# Altium PCB lined.PcbDoc (part 2 of 2)
Units mm, origin at the board's own origin, x right, y up, seen from the top; angles counter-clockwise.
Board outline 88.9 x 108.89 mm, 2 copper layers (Top Layer, Bottom Layer); 109 components, 117 nets, 494 pads, 325 vias.
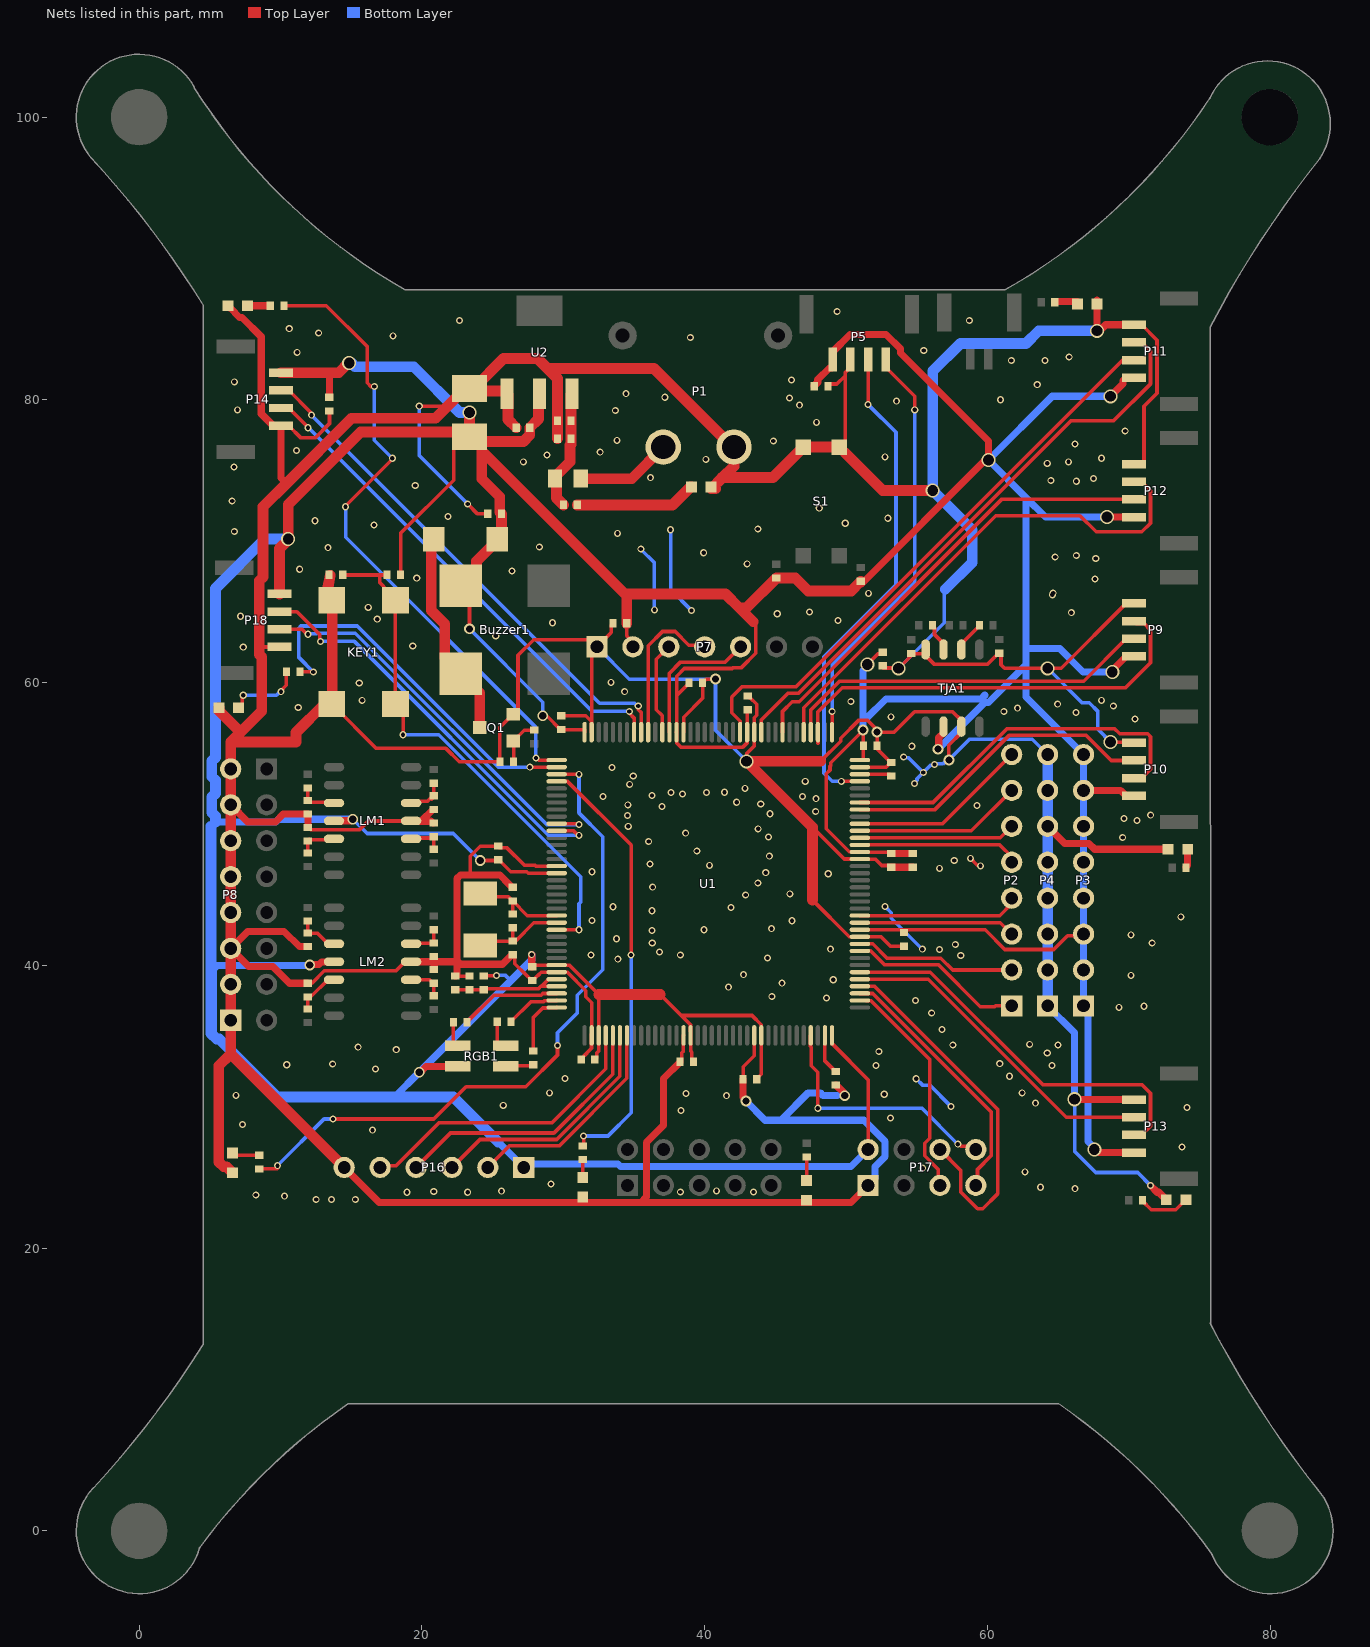
[diagram p2: the nets of this part, all layers, seen from the top]

## Via types
v1: diameter 0.5, hole 0.3, Top Layer to Bottom Layer, tented both sides, 293 vias
v2: diameter 0.991, hole 0.762, Top Layer to Bottom Layer, tented both sides, 16 vias
v3: diameter 0.762, hole 0.508, Top Layer to Bottom Layer, tented both sides, 16 vias

## Nets (pads, with @x,y where several pads share a name; then routed paths per layer and width w, separated by ;. In a path a pad name is that pad's centre, name@x,y a point inside that pad or via, vN(x,y) a via of type N, cw(c..) or ccw(c..) an arc to the next point about the centre after c; other vN are vias at no path point) (continued)
GND: C1.2 C2.2 C3.2 C4.2 C5.2 C6.2 C7.1 C8.1 C9.2 C10.1 C11.1 C12.1 C13.1 C14.1 C15.1 C16.1 C17.1 C18.1 C19.1 C20.1 C21.1 C22.1 C23.1 C24.1 C25.1 C26.1 C27.1 C28.1 C29.1 E1.2 KEY1.1 KEY1.2 LED1.2 LED2.2 LED3.2 LED4.2 LED5.2 LED6.2 LED7.2 LED8.2 LED9.2 LM1.11 LM2.11 P1.2 P4.1 P4.2 P4.3 P4.4 P4.5 P4.6 P4.7 P4.8 P5.3 P7.1 P8.1 P8.2 P8.3 P8.4 P8.5 P8.6 P8.7 P8.8 P9.4 P10.4 P11.4 P12.4 P13.4 P14.4 P16.6 P17.1 P18.4 Q1.1 R5.1 R6.1 R8.1 R9.1 R15.1 R16.1 R18.1 R19.1 R26.1 S1.1 S1.3 TJA1.3 TJA1.8 U1.16 U1.31 U1.38 U1.51 U1.61 U1.83 U1.94 U1.107 U1.120 U1.130 U1.143 U2.1 | length 640
  Top Layer w0.254: 8.497,62.662 8.636,62.523 P18.4@9.931,62.523 ; P14.4@10.033,78.176 10.583,78.176 11.451,77.308 12.446,77.308 13.462,78.324 C28.1@13.462,79.223 ; R19.1@11.919,38.739 12.224,38.739 13.099,39.614 18.17,39.614 18.81,40.254 LM2.11@19.235,40.254 ; R9.1@11.937,49.759 11.983,49.759 12.156,49.586 15.593,49.586 16.223,50.216 LM1.11@19.235,50.216 ; KEY1.1@13.625,58.479 13.65,58.479 16.782,55.347 21.699,55.347 22.639,54.407 R26.1@25.519,54.407 25.519,56.841 26.1,57.422 26.1,57.447 26.423,57.77 Q1.1@26.448,57.77 26.473,57.77 26.796,58.093 26.796,61.929 27.91,63.043 31.877,63.043 P7.1@32.385,62.535 ; v1(19.812,79.553) 21.59,79.553 21.699,79.444 ; C13.1@22.398,39.243 C14.1@23.368,39.243 ; v1(23.241,72.631) 23.938,71.934 C12.1@24.663,71.934 ; 23.495,46.401 23.419,46.477 23.419,47.716 24.138,48.435 C22.1@25.4,48.435 25.527,48.308 26.026,48.308 27.255,47.079 27.999,47.079 28.057,47.021 U1.16@29.534,47.021 ; C2.2@26.416,40.754 26.449,40.754 26.576,40.627 26.576,40.119 27.376,39.319 27.386,39.319 27.767,38.938 C18.1@27.813,38.938 27.859,38.938 28.24,39.319 28.25,39.319 28.443,39.512 29.525,39.512 U1.31@29.534,39.521 29.543,39.512 30.297,39.512 31.601,38.208 31.601,37.774 32.009,37.366 32.009,35.123 32,35.114 32,34.131 31.648,33.779 31.648,33.77 31.267,33.389 C23.1@31.267,33.343 ; C19.1@29.845,57.658 31.601,57.658 32,57.259 32,56.505 U1.143@32.009,56.496 32.009,62.159 P7.1@32.385,62.535 ; C8.1@33.528,64.186 33.401,64.059 33.401,63.551 P7.1@32.385,62.535 ; C24.1@38.252,33.198 38.379,33.325 38.379,33.821 38.5,33.942 38.5,35.037 U1.51@38.509,35.046 ; U1.130@38.509,56.496 38.518,56.505 38.518,57.552 39.853,58.887 C25.1@39.853,60.001 40.101,60.249 v3(40.767,60.249) ; C26.1@42.723,31.943 42.723,32.83 43.509,33.617 U1.61@43.509,35.046 ; v2(42.968,54.432) 42.968,54.988 43.5,55.52 43.5,56.487 U1.120@43.509,56.496 43.518,56.505 43.518,57.524 43.683,57.689 43.683,58.471 43.236,58.918 43.18,58.918 C27.1@43.053,59.045 ; 47.625,44.626 50.221,42.03 50.975,42.03 U1.83@50.984,42.021 52.479,42.021 53.149,41.351 C20.1@54.102,41.351 ; 47.625,49.775 49.878,47.522 50.982,47.522 U1.94@50.984,47.521 50.993,47.512 52.088,47.512 52.534,47.066 53.086,47.066 C9.2@53.213,46.939 ; 48.2,54.432 49.628,55.861 49.628,56.065 50.916,57.353 51.505,57.353 52.1,56.759 52.1,56.602 v3(52.197,56.505) ; C7.1@48.717,80.95 48.717,80.995 48.844,81.122 49.352,81.122 49.948,81.718 ; S1.3@49.525,76.66 49.948,76.237 49.948,81.718 ; P5.3@50.312,82.855 50.312,82.305 49.948,81.941 49.948,81.718 ; U1.107@50.984,54.021 52.832,54.021 53.167,54.356 52.197,55.326 C21.1@52.197,55.55 v3(52.197,56.505) ; C29.1@52.601,61.062 52.626,61.036 53.696,61.036 v2(53.721,61.011) 54.756,62.046 55.466,62.046 TJA1.8@55.626,62.206 ; TJA1.8@55.626,62.344 TJA1.8@55.626,62.206 ; v3(57.277,54.534) 57.277,55.58 58.166,56.469 TJA1.3@58.166,56.894 58.166,57.319 57.536,57.949 54.85,57.949 53.406,56.505 v3(52.197,56.505) ; v1(58.801,47.574) 59.287,47.088 59.465,47.088 v1(59.512,47.041) ; v2(67.754,84.887) v2@67.945,84.887 ; v2(68.707,55.804) 68.737,55.774 70.328,55.774 P10.4@70.358,55.744 ; P9.4@70.358,65.601 69.808,65.601 65.218,61.011 v2(64.262,61.011) 61.214,61.011 60.96,61.265 60.96,61.956 C11.1@60.833,62.083 60.787,62.083 59.993,61.289 56.256,61.289 55.626,61.919 TJA1.8@55.626,62.206 ; P12.4@70.358,75.458 70.908,75.458 71.081,75.631 71.081,79.555 71.995,80.469 71.995,84.227 70.908,85.315 P11.4@70.358,85.315
  Top Layer w0.508: LED2.2@6.286,86.666 6.773,86.18 6.773,86.154 7.1,85.827 7.279,85.827 8.64,84.465 8.64,79.019 9.483,78.176 P14.4@10.033,78.176 10.033,74.475 10.414,74.094 ; P8.7@6.477,51.359 7.684,50.152 9.649,50.152 10.195,50.698 R6.1@11.937,50.698 R9.1@11.937,49.759 ; R19.1@11.919,38.739 10.644,38.739 9.454,39.929 7.747,39.929 P8.3@6.477,41.199 7.684,42.406 10.254,42.406 11.335,41.326 R16.1@11.937,41.326 ; P16.6@14.503,25.705 16.981,23.228 35.496,23.228 ; LM2.11@19.235,40.254 20.955,40.254 ; LM1.11@19.235,50.216 19.253,50.198 20.644,50.198 20.782,50.06 R8.1@20.828,50.06 ; 19.985,50.233 20.782,51.03 R5.1@20.828,51.03 ; R18.1@20.828,39.704 20.874,39.704 20.874,40.173 20.955,40.254 ; C13.1@22.352,39.243 22.398,39.243 22.398,39.289 22.473,39.364 22.473,40.354 ; C2.2@26.416,40.754 26.37,40.754 25.702,40.086 22.741,40.086 22.473,40.354 ; C1.2@26.416,45.53 26.37,45.53 25.879,46.021 25.879,46.042 25.519,46.401 23.495,46.401 22.741,46.401 22.473,46.133 22.473,40.354 ; C24.1@38.252,33.198 38.252,33.152 37.093,31.993 37.093,28.691 35.877,27.475 35.877,23.609 35.496,23.228 ; C26.1@42.723,31.943 42.723,30.676 42.926,30.473 v3(42.926,30.404) ; C16.1@49.27,31.528 49.316,31.528 49.857,30.988 49.857,30.833 v3(49.905,30.785) ; P17.1@51.562,24.435 50.348,23.22 49.347,23.22 49.34,23.228 35.496,23.228 ; C9.2@53.213,46.939 C17.1@54.737,46.939 ; P4.6@64.262,49.835 65.469,48.628 67.176,48.628 67.592,48.212 LED7.2@72.784,48.212 ; v2@66.167,30.511 P13.4@70.358,30.511 ; v2(67.754,84.887) LED6.2@67.754,86.79 LED6.2@67.754,87.044 ; v2@67.945,84.887 68.373,85.315 P11.4@70.358,85.315 ; v1(71.538,24.435) 72.019,23.954 72.123,23.954 LED8.2@72.656,23.42 ; 20.955,40.254 22.373,40.254 22.473,40.354
  Top Layer w0.762: LED3.2@5.651,58.218 5.651,58.013 7.035,56.629 7.302,56.629 ; P8.7@6.477,51.185 P8.8@6.477,53.725 ; LED4.2@6.602,25.336 6.183,25.756 5.981,25.756 5.639,26.098 5.639,32.893 6.477,33.731 ; KEY1.1@13.1,58.471 11.096,56.467 11.096,55.804 6.477,55.804 ; KEY1.2@13.36,66.056 13.36,66.765 C6.2@13.521,67.598 ; KEY1.1@13.625,58.479 13.661,58.515 13.661,65.793 KEY1.2@13.625,65.829 ; P16.6@14.503,25.705 6.477,33.731 ; C3.2@26.67,78.029 26.09,78.609 26.09,80.364 U2.1@26.021,80.433 26.021,80.554 25.952,80.623 23.558,80.623 E1.2@23.368,80.814 ; C5.2@29.591,77.267 C4.2@29.591,78.537 29.587,78.541 29.587,81.518 28.885,82.22 ; LED1.2@40.767,73.711 40.475,73.711 41.27,74.506 ; 41.224,74.506 41.27,74.506 ; 47.625,44.626 47.625,49.775 v2(42.968,54.432) 48.2,54.432 ; S1.3@49.525,76.66 S1.1@46.985,76.66 44.831,74.506 41.27,74.506 ; S1.3@49.948,76.237 52.601,73.584 v2(56.134,73.584) ; 6.477,33.731 P8.1@6.477,36.119 P8.2@6.477,38.659 P8.3@6.477,41.199 P8.4@6.477,43.739 P8.5@6.477,46.279 P8.6@6.477,48.819 P8.7@6.477,51.359 P8.8@6.477,53.899 6.477,55.804 ; 6.477,55.804 7.302,56.629 ; 7.302,56.629 8.665,57.992 8.665,61.812 8.497,61.981 8.497,62.662 8.497,67.212 8.761,67.477 8.761,72.442 10.414,74.094 15.02,78.7 20.954,78.7 21.699,79.444 23.068,80.814 E1.2@23.368,80.814 ; E1.2@23.368,80.814 23.668,80.814 25.774,82.92 28.185,82.92 28.885,82.22 ; 28.885,82.22 36.424,82.22 42.073,76.57 42.073,75.309 41.27,74.506
  Bottom Layer w0.254: v1(19.812,79.553) 19.812,76.06 v1(23.241,72.631) ; P7.1@32.385,62.535 34.671,60.249 v3(40.767,60.249) 40.767,56.633 v2(42.968,54.432) ; v1(35.484,69.444) 36.449,68.478 v1(36.449,65.151) ; v1(37.592,70.815) 37.592,66.573 v1(39.065,65.1) ; v1(52.756,44.171) 53.202,43.724 53.202,43.343 v1(55.397,41.148) ; v2(53.721,61.011) 56.951,64.241 56.951,66.527 57.023,66.599 ; v1(54.077,54.737) 54.124,54.69 54.421,54.69 v1(55.466,53.645) ; v1(54.839,52.857) 54.839,52.924 55.02,53.105 55.02,53.199 v1(55.466,53.645) ; v1(54.966,31.979) 55.412,31.532 55.92,31.532 v1(57.429,30.023) ; P4.8@64.262,54.915 63.182,55.995 58.738,55.995 v3(57.277,54.534) 57.14,54.534 56.856,54.251 56.303,54.251 v1(56.256,54.204) 56.209,54.157 55.978,54.157 v1(55.466,53.645) ; v2(64.262,61.011) 66.69,58.582 67.198,58.582 67.818,57.963 67.818,56.693 v2(68.707,55.804) ; v2(66.167,30.531) 66.167,26.848 67.667,25.347 70.626,25.347 v1(71.538,24.435)
  Bottom Layer w0.508: v3(42.926,30.404) 44.279,29.051 45.466,29.051 ; 49.403,30.785 48.371,30.785 48.172,30.984 47.332,30.984 45.466,29.118 45.466,29.051 ; P17.1@51.562,24.435 52.058,24.931 52.058,25.764 52.769,26.475 52.769,27.546 51.264,29.051 45.466,29.051 ; P4.1@64.262,37.135 66.167,35.23 v2(66.167,30.531)
  Bottom Layer w0.762: 57.023,66.599 58.928,68.504 58.928,70.79 v2(56.134,73.584) 56.134,82.038 58.094,83.998 62.738,83.998 63.627,84.887 v2(67.754,84.887) ; P4.1@64.262,37.135 P4.2@64.262,39.675 P4.3@64.262,42.215 P4.4@64.262,44.755 P4.5@64.262,47.295 P4.6@64.262,49.835 P4.7@64.262,52.375 P4.8@64.262,54.915
  other v1: 12.522,23.444 13.614,23.444 15.291,23.444 10.287,23.673 8.255,23.749 18.948,23.952 23.241,23.952 38.278,23.978 43.459,23.978 20.838,24.003 25.629,24.028 40.843,24.054 66.192,24.206 63.754,24.308 29.134,24.536 62.662,25.4 55.423,25.654 73.762,27.153 16.51,28.346 7.315,28.753 53.149,29.21 38.329,29.743 74.117,29.947 25.756,30.099 63.398,30.251 41.554,30.785 6.858,30.81 52.705,30.886 38.684,30.937 29.032,30.988 62.459,30.988 30.124,32.004 61.57,32.156 16.713,32.664 52.121,32.918 64.567,32.918 10.439,32.969 13.691,33.02 60.877,33.045 64.237,33.807 52.324,33.9 18.186,34.036 15.494,34.214 57.556,34.366 64.999,34.366 62.992,34.417 56.794,35.458 56.058,36.627 69.317,37.033 71.069,37.109 54.915,37.516 48.616,37.694 44.755,37.795 41.681,38.456 45.466,38.739 49.098,38.984 70.155,39.294 42.748,39.345 33.858,40.437 44.45,40.513 58.115,40.691 31.953,40.742 38.278,40.742 36.805,40.945 56.617,41.126 48.895,41.148 57.734,41.478 36.297,41.58 71.653,41.58 33.757,41.885 70.155,42.164 36.271,42.469 39.954,42.52 44.729,42.596 46.177,43.155 32.029,43.18 73.685,43.434 36.271,43.866 41.859,44.094 33.509,44.145 42.901,44.983 46.025,45.06 36.322,45.53 43.764,45.822 48.743,46.482 44.323,46.558 32.029,46.622 56.617,46.863 40.335,47.079 36.144,47.168 57.658,47.422 44.577,47.727 39.446,48.082 36.043,48.768 69.571,49.047 44.509,49.082 38.659,49.352 43.79,49.657 34.595,49.835 70.587,50.241 69.672,50.394 34.544,50.597 71.552,50.622 44.628,50.724 47.854,50.876 36.982,51.232 59.258,51.308 34.569,51.359 43.967,51.41 42.266,51.537 47.879,51.791 32.817,51.943 46.914,51.943 36.271,52.019 38.43,52.121 37.617,52.222 40.132,52.222 41.402,52.248 42.85,52.521 34.696,52.807 47.117,53.021 34.95,53.391 33.452,54 54.656,55.499 70.434,57.429 53.188,57.582 66.269,57.887 61.163,57.949 62.128,58.191 11.252,58.242 68.91,58.344 64.973,58.479 50.343,58.674 15.773,58.75 68.072,58.75 34.341,59.36 15.57,59.969 33.376,60.02 7.366,62.509 19.355,62.586 25.222,63.297 29.235,64.237 49.428,64.389 16.84,64.491 7.163,64.694 45.136,64.872 65.938,64.948 47.422,64.999 16.205,65.329 64.592,66.218 51.587,66.319 64.653,66.345 67.615,67.335 19.634,67.386 26.37,67.894 11.354,68.021 43.009,68.402 67.666,68.783 64.795,68.885 66.294,68.986 39.929,69.19 13.36,69.545 28.308,69.596 33.833,70.561 6.731,70.688 43.764,70.866 16.612,71.145 49.948,71.272 12.446,71.45 52.959,71.628 21.844,71.755 48.108,72.339 6.579,72.847 19.533,73.939 66.294,74.244 64.491,74.295 67.513,74.447 36.17,74.498 6.706,75.26 64.237,75.514 27.178,75.616 65.735,75.616 40.081,75.794 68.072,75.87 52.756,75.971 28.854,76.098 32.614,76.302 11.125,76.429 66.192,76.886 44.856,77.098 33.807,77.14 69.748,77.8 47.904,78.41 33.68,79.248 6.96,79.299 46.711,79.629 53.569,79.908 60.935,80.01 45.999,80.137 37.186,80.188 34.442,80.442 63.525,81.077 6.731,81.28 46.152,81.407 61.697,82.779 64.084,82.779 65.786,83.033 11.176,83.363 55.499,83.49 38.989,84.404 17.958,84.531 12.7,84.734 10.617,85.039 22.657,85.623 58.725,85.623 49.378,86.258
I2C1_SCL: P14.2 U1.136 | length 36.5
  Top Layer w0.254: P14.2@10.033,80.676 10.583,80.676 12.145,79.114 12.145,78.965 v1(12.192,78.918) ; v1(35.306,58.344) 35.306,58.09 35.509,57.887 U1.136@35.509,56.496
  Bottom Layer w0.254: v1(12.192,78.918) 32.567,58.543 35.04,58.543 35.239,58.344 v1(35.306,58.344)
I2C1_SDA: P14.3 U1.137 | length 35.2
  Top Layer w0.254: P14.3@10.033,79.426 10.583,79.426 11.938,78.071 v1(11.938,78.029) ; v1(34.671,57.963) 34.671,57.836 35.009,57.498 U1.137@35.009,56.496
  Bottom Layer w0.254: v1(11.938,78.029) 11.985,78.029 32.051,57.963 v1(34.671,57.963)
I2C2_SCL: P18.2 U1.11 | length 29.7
  Top Layer w0.254: P18.2@9.931,65.023 9.933,65.02 11.162,65.02 12.78,63.402 12.78,62.963 v1(12.827,62.916) ; U1.11@29.534,49.521 30.727,49.521 31.048,49.2 v1(31.115,49.2)
  Bottom Layer w0.254: v1(12.827,62.916) 15.23,62.916 28.946,49.2 v1(31.115,49.2)
I2C2_SDA: P18.3 U1.10 | length 28.6
  Top Layer w0.254: P18.3@9.931,63.773 11.522,63.773 11.871,63.424 v1(11.938,63.424) ; U1.10@29.534,50.021 30.989,50.021 31.048,49.962 v1(31.115,49.962)
  Bottom Layer w0.254: v1(11.938,63.424) 11.985,63.471 12.562,63.471 12.587,63.496 15.296,63.496 28.83,49.962 v1(31.115,49.962)
IRQ: P17.8 U1.69 | length 17.8
  Top Layer w0.254: U1.69@47.509,35.046 47.489,35.027 47.489,34.272 47.552,34.209 47.552,32.902 48.009,32.445 v1(48.009,29.896) ; v1(57.912,27.356) 57.979,27.356 58.121,27.213 58.944,27.213 P17.8@59.182,26.975
  Bottom Layer w0.254: v1(48.009,29.896) 55.372,29.896 v1(57.912,27.356)
NetBuzzer1_2: Buzzer1.2 D1.2 Q1.3 | length 14.8
  Top Layer w0.762: D1.2@20.828,70.155 20.656,69.983 20.656,65.111 21.622,64.146 21.622,61.749 Buzzer1.2@22.741,60.63 24.098,59.272 Q1.3@24.098,56.82
NetC4_1: C4.1 C5.1 F1.1 R2.1 U2.3 | length 8.6
  Top Layer w0.762: R2.1@30.023,72.568 29.528,73.062 29.528,74.307 F1.1@29.409,74.426 29.409,74.561 30.48,75.631 30.48,76.791 30.556,76.867 C5.1@30.556,77.267 C4.1@30.556,78.537 30.556,80.368 U2.3@30.621,80.433
NetC15_2: C15.2 U1.106 | length 2.3
  Top Layer w0.254: U1.106@50.984,53.521 50.993,53.512 53.092,53.512 C15.2@53.213,53.391
NetC16_2: C16.2 U1.71 | length 2.9
  Top Layer w0.254: U1.71@48.509,35.046 48.509,33.238 49.224,32.523 C16.2@49.195,32.494
NetLED1_1: LED1.1 R2.2 | length 8.6
  Top Layer w0.762: R2.2@30.988,72.568 37.733,72.568 39.003,73.838 LED1.1@39.065,73.838
NetLED2_1: LED2.1 R30.1 | length 1.6
  Top Layer w0.508: LED2.1@7.671,86.665 R30.1@9.271,86.665
NetLED3_1: LED3.1 R31.1 | length 5.4
  Top Layer w0.254: LED3.1@7.036,58.217 7.29,58.471 7.29,58.963 7.366,59.039 v1(7.366,59.106) ; v1(10.033,59.36) 10.033,59.426 10.414,59.807 R31.1@10.414,60.757
  Bottom Layer w0.254: v1(7.366,59.106) 9.712,59.106 9.966,59.36 v1(10.033,59.36)
NetLED4_1: LED4.1 R32.1 | length 2
  Top Layer w0.254: LED4.1@6.604,26.721 6.756,26.568 R32.1@8.509,26.568
NetLED5_1: LED5.1 R33.1 | length 1.5
  Top Layer w0.254: LED5.1@31.357,24.765 31.369,24.777 R33.1@31.369,26.264
NetLED6_1: LED6.1 R34.1 | length 1.6
  Top Layer w0.508: R34.1@64.77,86.919 64.77,86.965 LED6.1@66.37,86.965
NetLED7_1: LED7.1 R35.1 | length 1.3
  Top Layer w0.508: R35.1@74.041,46.914 74.041,46.96 74.149,47.068 74.149,48.191 LED7.1@74.168,48.211
NetLED8_1: LED8.1 R36.1 | length 3.7
  Top Layer w0.254: R36.1@70.968,23.381 70.968,23.335 71.593,22.709 73.331,22.709 LED8.1@74.041,23.419
NetLED9_1: LED9.1 R37.1 | length 1.7
  Top Layer w0.254: R37.1@47.21,26.457 LED9.1@47.212,24.777 LED9.1@47.212,24.777
NetLM1_3: LM1.3 R6.2 R7.1 | length 3
  Top Layer w0.254: R6.2@11.811,51.714 11.811,51.664 11.923,51.552 13.719,51.552 LM1.3@13.785,51.486 ; R6.2@11.937,51.664 R7.1@11.937,52.553
NetLM1_5: LM1.5 R9.2 R12.1 | length 3
  Top Layer w0.254: R9.2@11.811,48.793 R9.2@11.857,48.793 ; R9.2@11.919,48.812 R9.2@12.027,48.92 ; R12.1@11.937,47.953 R9.2@11.937,48.793 12.023,48.88 13.719,48.88 LM1.5@13.785,48.946
NetLM1_10: LM1.10 R8.2 R13.1 | length 2.6
  Top Layer w0.254: LM1.10@19.235,48.946 19.301,49.012 20.745,49.012 R8.2@20.828,49.095 R13.1@20.828,48.211 ; R8.2@20.702,49.146 R8.2@20.765,49.082
NetLM1_12: LM1.12 R4.2 R5.2 | length 3
  Top Layer w0.254: LM1.12@19.235,51.486 19.754,51.486 19.882,51.614 20.401,51.614 20.782,51.995 R5.2@20.828,51.995 ; R5.2@20.702,51.765 R5.2@20.853,51.916 ; R4.2@20.853,52.78 R5.2@20.853,51.916 ; R5.2@20.884,51.892 20.853,51.892 R5.2@20.853,51.916 ; R5.2@20.932,51.995 R5.2@20.853,51.916
NetLM2_3: LM2.3 R16.2 R17.1 | length 3.2
  Top Layer w0.254: R17.1@11.811,43.231 11.811,43.134 R17.1@11.857,43.134 ; R17.1@11.937,43.134 R16.2@11.937,42.291 11.962,42.266 12.618,42.266 13.36,41.524 LM2.3@13.785,41.524 LM2.3@13.719,41.59
NetLM2_5: LM2.5 R19.2 R20.1 | length 3.2
  Top Layer w0.254: R20.1@11.919,36.915 R19.2@11.919,37.774 12.15,37.774 13.36,38.984 LM2.5@13.785,38.984
NetLM2_10: LM2.10 R18.2 R21.1 | length 2.6
  Top Layer w0.254: LM2.10@19.235,38.984 20.537,38.984 20.782,38.739 R18.2@20.828,38.739 R21.1@20.828,37.846
NetLM2_12: LM2.12 R14.2 R15.2 | length 2.6
  Top Layer w0.254: LM2.12@19.235,41.524 19.265,41.554 20.798,41.554 R15.2@20.828,41.584 20.828,42.393 R14.2@20.703,42.518 ; R15.2@20.702,41.584 R15.2@20.704,41.586 ; R14.2@20.702,42.518 R14.2@20.704,42.52
NetQ1_2: Q1.2 R25.2 R26.2 | length 3.3
  Top Layer w0.254: R26.2@26.485,54.407 26.485,55.833 Q1.2@26.448,55.87 26.473,55.87 27.245,56.642 R25.2@27.94,56.642
NetR22_1: R22.1 TJA1.7 | length 2
  Top Layer w0.254: R22.1@56.109,64.064 56.109,64.018 56.256,63.87 56.256,63.409 56.896,62.769 TJA1.7@56.896,62.344
NetR23_1: R23.1 TJA1.6 | length 2.2
  Top Layer w0.254: TJA1.6@58.166,62.344 58.166,62.748 59.436,64.018 R23.1@59.436,64.064
NetR27_2: R27.2 RGB1.4 | length 2.2
  Top Layer w0.254: R27.2@25.328,36.006 25.328,34.552 25.576,34.304 RGB1.4@25.935,34.304
NetR28_1: R28.1 RGB1.2 | length 1.9
  Top Layer w0.254: R28.1@22.225,35.992 22.225,34.552 22.473,34.304 RGB1.2@22.535,34.304
NetR29_2: R29.2 RGB1.3 | length 2
  Top Layer w0.254: RGB1.3@25.935,32.854 25.993,32.912 27.821,32.912 R29.2@27.879,32.969
NRST: C6.1 KEY1.3 KEY1.4 R3.1 U1.25 | length 37.1
  Top Layer w0.254: C6.1@14.402,67.615 17.015,67.615 ; R3.1@17.526,67.615 17.015,67.615 ; KEY1.4@17.625,65.821 17.625,66.472 17.015,67.081 17.015,67.615 ; KEY1.4@18.125,65.829 KEY1.3@18.125,58.479 18.76,57.844 18.669,57.753 v1(18.669,56.312) ; U1.25@29.534,42.521 v1(31.115,42.521)
  Bottom Layer w0.254: v1(18.669,56.312) 21.187,56.312 31.236,46.263 31.236,44.486 31.115,44.365 v1(31.115,42.521)
OSC_IN: C1.1 R1.2 U1.23 x1.1 | length 7
  Top Layer w0.254: x1.1@24.13,45.094 24.38,44.844 26.096,44.844 26.121,44.818 26.162,44.818 C1.1@26.416,44.564 C1.1@26.418,44.563 ; R1.2@26.419,43.625 26.418,43.626 C1.1@26.418,44.563 ; U1.23@29.534,43.521 27.46,43.521 C1.1@26.418,44.563
OSC_OUT: C2.1 R1.1 U1.24 x1.2 | length 6.9
  Top Layer w0.254: x1.2@24.13,41.72 C2.1@26.416,41.72 ; R1.1@26.419,42.659 26.418,42.658 26.418,41.721 C2.1@26.416,41.72 ; U1.24@29.534,43.021 29.525,43.012 27.921,43.012 26.629,41.72 C2.1@26.416,41.72
RES: P7.5 U1.132 | length 10
  Top Layer w0.254: U1.132@37.509,56.496 37.509,60.673 38.291,61.455 41.465,61.455 P7.5@42.545,62.535
RLED_1: R30.2 U1.1 | length 45.6
  Top Layer w0.254: R30.2@10.236,86.665 13.24,86.665 16.129,83.776 16.129,81.204 16.383,80.95 v1(16.637,80.95) ; v1(14.605,72.442) 14.605,72.505 17.907,75.807 v1(17.907,75.87) ; v1(28.067,54.661) 28.134,54.661 28.274,54.521 U1.1@29.534,54.521
  Bottom Layer w0.254: v1(14.605,72.442) 14.605,70.282 28.067,56.82 v1(28.067,54.661) ; v1(16.637,80.95) 16.637,77.14 v1(17.907,75.87)
RLED_2: R31.2 U1.2 | length 26.9
  Top Layer w0.254: R31.2@11.379,60.757 v1(12.319,60.757) ; v1(27.635,54.021) U1.2@29.534,54.021
  Bottom Layer w0.254: v1(12.319,60.757) 11.303,61.773 11.303,63.855 11.452,64.004 15.435,64.004 25.418,54.021 v1(27.635,54.021)
RLED_3: R32.2 U1.3 | length 47.9
  Top Layer w0.254: R32.2@8.509,25.603 9.738,25.603 v1@9.839,25.705 ; v1(13.716,29.134) 20.838,29.134 23.125,31.421 27.351,31.421 29.591,33.661 v1(29.591,34.341) ; U1.3@29.534,53.521 29.538,53.516 31.111,53.516 v1(31.115,53.512)
  Bottom Layer w0.254: v1(9.779,25.832) 13.081,29.134 v1(13.716,29.134) ; v1(29.591,34.341) 29.591,35.23 30.988,36.627 30.988,37.897 32.788,39.697 32.788,49.11 31.115,50.782 v1(31.115,53.512)
RLED_4: R33.2 U1.4 | length 30.8
  Top Layer w0.254: U1.4@29.534,53.021 29.543,53.012 30.297,53.012 34.798,48.511 v1(34.798,40.742) ; R33.2@31.369,27.229 31.436,27.295 v1(31.436,27.93)
  Bottom Layer w0.254: v1(31.436,27.93) 33.163,27.93 34.798,29.566 v1(34.798,40.742)
SPI1_MISO: P16.3 U1.42 | length 17.4
  Top Layer w0.254: P16.3@22.123,25.705 24.105,27.686 29.529,27.686 34,32.158 34,35.037 U1.42@34.009,35.046
SPI1_MOSI: P16.2 U1.43 | length 15.5
  Top Layer w0.254: P16.2@24.663,25.705 26.187,27.229 29.718,27.229 34.5,32.011 34.5,35.037 U1.43@34.509,35.046
SPI1_NSS: P16.5 U1.40 | length 21.2
  Top Layer w0.254: P16.5@17.043,25.705 17.162,25.823 18.174,25.823 21.231,28.88 29.21,28.88 33.009,32.679 U1.40@33.009,35.046
SPI1_SCK: P16.4 U1.41 | length 19.4
  Top Layer w0.254: P16.4@19.583,25.705 22.022,28.143 29.339,28.143 33.5,32.304 33.5,35.037 U1.41@33.509,35.046
SPI2_MISO: P17.7 U1.75 | length 18.4
  Top Layer w0.254: U1.75@50.984,38.021 50.993,38.012 51.893,38.012 60.262,29.643 60.262,26.527 59.301,25.566 59.301,24.553 P17.7@59.182,24.435
SPI2_MOSI: P17.6 U1.76 | length 26.5
  Top Layer w0.254: U1.76@50.938,38.512 52.04,38.512 60.719,29.833 60.719,23.835 59.668,22.784 59.305,22.784 58.102,23.987 58.102,25.515 P17.6@56.642,26.975
SPI2_SCK: P17.5 U1.74 | length 15.7
  Top Layer w0.254: U1.74@51.435,37.501 51.446,37.512 51.747,37.512 55.916,33.343 55.916,27.777 55.562,27.422 55.562,26.527 56.523,25.566 56.523,24.553 P17.5@56.642,24.435
SPI3_CLK: P7.3 U1.133 | length 6.6
  Top Layer w0.254: U1.133@37.009,56.496 37.009,57.672 36.588,58.093 36.588,61.658 P7.3@37.465,62.535
SPI3_MOSI: P7.4 U1.135 | length 11
  Top Layer w0.254: U1.135@36.009,56.496 36.009,62.606 37.018,63.615 37.912,63.615 38.874,62.653 39.886,62.653 P7.4@40.005,62.535
SWCLK: P5.1 U1.109 | length 30.2
  Top Layer w0.254: U1.109@49.009,57.061 U1.109@49.009,56.496 49.022,56.483 v1(49.022,57.963) ; P5.1@52.812,82.855 52.812,82.305 54.864,80.253 v1(54.864,79.299)
  Bottom Layer w0.254: v1(49.022,57.963) 49.022,61.253 54.864,67.095 v1(54.864,79.299)
SWDIO: P5.2 U1.105 | length 35
  Top Layer w0.254: v1(49.668,53.021) U1.105@50.984,53.021 ; v1(51.562,79.68) P5.2@51.562,82.855
  Bottom Layer w0.254: v1(49.668,53.021) 49.02,53.021 48.442,53.599 48.442,61.824 53.539,66.921 53.539,77.703 v1(51.562,79.68)
TIM3_CH1: P2.5 U1.96 | length 11.5
  Top Layer w0.254: U1.96@50.984,48.521 60.877,48.521 61.722,47.676 P2.5@61.722,47.295
TIM3_CH2: P2.6 U1.97 | length 11.1
  Top Layer w0.254: U1.97@50.984,49.021 60.908,49.021 P2.6@61.722,49.835
TIM3_CH3: P2.7 U1.98 | length 11.9
  Top Layer w0.254: U1.98@50.984,49.521 58.868,49.521 P2.7@61.722,52.375
TIM3_CH4: P2.8 U1.99 | length 12.8
  Top Layer w0.254: U1.99@50.984,50.021 56.828,50.021 P2.8@61.722,54.915
TIM4_CH1: P2.1 U1.81 | length 12.4
  Top Layer w0.254: U1.81@50.984,41.021 51.74,41.021 52.705,40.056 56.515,40.056 59.501,37.069 60.514,37.069 60.579,37.135 P2.1@61.722,37.135
TIM4_CH2: P2.2 U1.82 | length 11.7
  Top Layer w0.254: U1.82@50.82,41.521 U1.82@50.984,41.521 U1.82@51.328,41.521 ; U1.82@51.308,41.541 U1.82@51.328,41.521 ; P2.2@61.722,39.675 57.543,39.675 56.704,40.513 52.894,40.513 51.887,41.521 U1.82@51.328,41.521
TIM4_CH3: P2.3 U1.85 | length 11.1
  Top Layer w0.254: U1.85@50.984,43.021 60.916,43.021 P2.3@61.722,42.215
TIM4_CH4: P2.4 U1.86 | length 11.5
  Top Layer w0.254: U1.86@50.984,43.521 60.869,43.521 61.722,44.374 P2.4@61.722,44.755
TIM5_CH1_B: R28.2 U1.34 | length 7.2
  Top Layer w0.254: R28.2@23.19,35.992 25.095,37.897 28.439,37.897 28.554,38.012 29.525,38.012 U1.34@29.534,38.021
TIM5_CH2_G: R27.1 U1.35 | length 3.9
  Top Layer w0.254: R27.1@26.293,36.006 27.727,37.44 28.629,37.44 28.701,37.512 29.525,37.512 U1.35@29.534,37.521
TIM5_CH3_R: R29.1 U1.36 | length 4.3
  Top Layer w0.254: R29.1@27.879,33.934 27.879,36.311 28.55,36.982 28.818,36.982 28.848,37.012 29.525,37.012 U1.36@29.534,37.021
UART4_RX: P9.2 U1.112 | length 26.5
  Top Layer w0.254: U1.112@47.509,56.496 47.518,56.505 47.518,58.08 49.541,60.103 66.811,60.103 69.808,63.101 P9.2@70.358,63.101
UART4_TX: P9.3 U1.111 | length 31.7
  Top Layer w0.254: U1.111@48.009,56.496 U1.111@48.009,56.499 ; U1.111@48.029,56.499 48.029,55.722 48.018,55.733 48.018,56.49 U1.111@48.009,56.499 ; P9.3@70.358,64.351 70.531,64.178 71.087,64.178 71.538,63.726 71.538,61.414 69.77,59.646 49.731,59.646 48.009,57.925 U1.111@48.009,56.499
UART5_RX: P12.2 U1.116 | length 32.5
  Top Layer w0.254: U1.116@45.509,56.496 45.509,57.963 46.202,58.656 46.69,58.656 60.992,72.958 P12.2@70.358,72.958
UART5_TX: P12.3 U1.113 | length 36.9
  Top Layer w0.254: U1.113@47.009,56.496 47.009,58.218 60.597,71.806 66.548,71.806 67.691,70.663 70.93,70.663 71.538,71.271 71.538,73.578 70.908,74.208 P12.3@70.358,74.208 P12.3@69.808,74.208
USART1_RX: P10.2 U1.102 | length 26.7
  Top Layer w0.254: U1.102@50.984,51.521 56.154,51.521 61.381,56.748 68.997,56.748 69.371,56.374 71.345,56.374 71.538,56.181 71.538,53.874 70.908,53.244 P10.2@70.358,53.244
USART1_TX: P10.3 U1.101 | length 22.3
  Top Layer w0.254: U1.101@50.984,51.021 56.3,51.021 61.571,56.291 66.953,56.291 68.751,54.494 P10.3@70.358,54.494
USART2_RX: P11.2 U1.122 | length 41.1
  Top Layer w0.254: U1.122@42.509,56.496 42.509,57.266 41.91,57.865 41.91,58.979 42.626,59.695 46.436,59.695 69.556,82.815 P11.2@70.358,82.815
USART2_TX: P11.3 U1.119 | length 42
  Top Layer w0.254: U1.119@44.009,56.496 44.018,56.505 44.018,57.377 45.879,59.238 46.626,59.238 65.925,78.537 68.947,78.537 71.538,81.128 71.538,83.435 70.908,84.065 P11.3@70.358,84.065
USART3_RX: P13.2 U1.78 | length 27.9
  Top Layer w0.254: U1.78@50.984,39.521 55.956,39.521 63.93,31.547 70.939,31.547 71.538,30.948 71.538,28.641 70.908,28.011 P13.2@70.358,28.011
USART3_TX: P13.3 U1.77 | length 23.4
  Top Layer w0.254: U1.77@50.984,39.021 55.81,39.021 65.57,29.261 P13.3@70.358,29.261
VCC: Buzzer1.1 C3.1 C7.2 C8.2 C9.1 C12.2 C17.2 C18.2 C19.2 C20.2 C21.2 C22.2 C23.2 C24.2 C25.2 C26.2 C27.2 C28.2 C29.2 D1.1 E1.1 LM1.4 LM2.4 P3.1 P3.2 P3.3 P3.4 P3.5 P3.6 P3.7 P3.8 P5.4 P7.2 P9.1 P10.1 P11.1 P12.1 P13.1 P14.1 P16.1 P17.2 P18.1 R3.2 R10.2 R11.1 R38.1 RGB1.1 TJA1.2 U1.17 U1.30 U1.39 U1.52 U1.62 U1.72 U1.84 U1.95 U1.108 U1.121 U1.131 U1.144 U2.2 | length 516.7
  Top Layer w0.254: R3.2@18.491,67.615 18.491,70.556 22.245,74.31 22.245,76.571 E1.1@23.068,77.394 ; Buzzer1.1@22.741,66.853 23.368,66.225 v3(23.368,63.805) ; v3(24.13,47.422) 25.398,47.422 25.446,47.47 26.294,46.622 27.418,46.622 27.519,46.521 U1.17@29.534,46.521 ; R38.1@24.384,39.243 24.407,39.266 25.25,39.266 v1(25.273,39.289) ; C18.2@27.813,39.903 27.922,40.012 29.525,40.012 U1.30@29.534,40.021 29.543,40.012 30.443,40.012 32.509,37.946 U1.39@32.509,35.046 32.5,35.037 32.5,33.942 32.36,33.801 32.36,33.47 C23.2@32.233,33.343 ; v3(28.55,57.658) 28.824,57.658 29.81,56.672 31.509,56.672 U1.144@31.509,56.496 ; C8.2@34.493,64.186 34.493,63.304 34.925,62.872 P7.2@34.925,62.535 ; 36.862,37.946 38.354,36.455 ; C25.2@38.887,60.001 38.887,59.955 38.018,59.085 ; C24.2@39.218,33.198 39.091,33.325 39.091,33.869 39.018,33.942 39.018,35.339 39,35.357 39,35.809 38.354,36.455 ; C27.2@43.053,58.08 43.018,58.045 43.018,56.575 43.009,56.566 U1.121@43.009,56.496 43,56.487 43,55.733 42.708,55.441 38.31,55.441 38.018,55.733 38.018,56.487 U1.131@38.009,56.496 38.018,56.505 38.018,59.085 ; 43.434,64.313 43.625,64.122 43.625,62.087 42.605,61.067 42.033,61.067 41.963,60.997 38.564,60.997 38.018,60.451 38.018,59.085 ; C26.2@43.688,31.943 43.688,31.989 44.009,32.31 U1.62@44.009,35.046 44,35.055 44,35.809 43.354,36.455 38.354,36.455 ; U1.72@49.009,35.046 49.009,34.471 51.562,31.918 P17.2@51.562,26.975 ; U1.84@50.984,42.521 59.841,42.521 61.236,41.126 64.701,41.126 65.671,42.096 66.683,42.096 P3.3@66.802,42.215 ; U1.108@50.984,54.521 51.211,54.521 51.232,54.542 51.211,54.563 v3(51.211,56.642) 48.911,54.342 48.911,54.138 48.87,54.097 48.87,53.823 48.595,53.548 48.595,49.656 50.221,48.03 50.975,48.03 U1.95@50.984,48.021 50.993,48.012 53.105,48.012 C9.1@53.213,47.904 ; v2(51.505,61.289) 52.243,62.027 52.474,62.027 C29.2@52.601,62.154
  Top Layer w0.508: v3(12.065,40.021) 12.114,40.069 12.728,40.069 12.895,40.237 13.767,40.237 LM2.4@13.785,40.254 ; 13.208,81.926 13.462,81.672 C28.2@13.462,80.188 ; LM1.4@13.785,50.216 13.803,50.233 14.935,50.233 15.044,50.343 v3(15.113,50.343) ; v3(19.812,32.436) 19.881,32.436 20.299,32.854 RGB1.1@22.535,32.854 ; v1(27.767,40.754) 27.767,39.903 C18.2@27.813,39.903 ; C7.2@47.752,80.95 47.752,80.996 48.006,81.25 48.006,81.439 48.826,82.259 49.016,82.259 49.062,82.305 P5.4@49.062,82.855 49.062,83.405 50.29,84.633 52.831,84.633 53.847,83.616 53.847,83.322 60.071,77.098 v2(60.071,75.743) 59.853,75.743 R11.1@51.095,66.985 ; C9.1@53.213,47.904 C17.2@54.737,47.904 ; v3(56.515,55.296) 56.564,55.344 56.564,56.112 56.896,56.444 TJA1.2@56.896,56.894 ; P3.7@66.802,52.375 69.427,52.375 69.808,51.994 P10.1@70.358,51.994 ; v2(67.564,26.975) 67.695,26.975 67.909,26.761 P13.1@70.358,26.761 ; v2(68.453,71.708) P12.1@70.358,71.708 ; v2(68.707,80.253) 69.596,81.142 69.596,81.353 69.808,81.565 P11.1@70.358,81.565 ; v2@68.834,60.995 68.953,60.995 69.808,61.851 P9.1@70.358,61.851
  Top Layer w0.762: P18.1@9.931,66.273 9.931,69.483 10.541,70.093 v2(10.541,70.155) 10.541,72.593 15.683,77.735 E1.1@23.368,77.735 ; P14.1@10.033,81.926 13.208,81.926 14.122,81.926 14.797,82.601 v2(14.859,82.601) ; Buzzer1.1@22.741,66.853 23.86,67.972 23.86,68.584 25.328,70.053 D1.1@25.328,70.155 25.629,70.455 C12.2@25.629,71.934 25.502,72.061 25.502,73.154 24.237,74.419 24.237,76.398 ; v2(23.368,79.114) E1.1@23.368,77.735 ; U2.2@28.321,80.433 28.252,80.364 28.252,78.646 C3.1@27.635,78.029 27.635,77.51 27.189,77.064 E1.1@23.998,77.064 ; 32.509,37.946 36.862,37.946 ; C8.2@34.493,64.186 34.493,66.142 24.237,76.398 ; 34.493,66.269 41.478,66.269 42.456,65.291 ; 43.434,64.313 42.456,65.291 ; R11.1@51.049,67.174 50.363,66.488 47.327,66.488 46.413,67.403 R10.2@45.08,67.403 42.968,65.291 42.456,65.291 ; E1.1@23.368,77.735 E1.1@23.368,77.394 23.668,77.394 E1.1@23.998,77.064 ; E1.1@23.998,77.064 24.237,76.825 24.237,76.398
  Bottom Layer w0.254: v3(15.113,50.343) 16.129,49.327 22.225,49.327 v3(24.13,47.422) ; v3(23.368,63.805) 28.55,58.623 v3(28.55,57.658) ; v1(25.273,39.289) 25.913,39.289 26.289,38.913
  Bottom Layer w0.508: 5.08,49.835 5.397,50.152 9.681,50.152 9.872,50.343 v3(15.113,50.343) ; 5.27,35.179 5.27,39.736 5.525,39.992 12.036,39.992 v3(12.065,40.021) ; 18.034,30.69 18.066,30.69 v3(19.812,32.436) 26.289,38.913 27.767,40.391 v1(27.767,40.754) ; 25.4,27.508 P16.1@27.203,25.705 27.457,25.959 33.853,25.959 34.044,25.768 50.355,25.768 P17.2@51.562,26.975 ; v3(51.211,56.642) 51.211,60.864 51.505,61.158 v2(51.505,61.289) ; 51.435,57.455 52.832,58.852 59.563,58.852 59.817,59.106 ; v3@56.549,55.261 56.515,55.227 v3(56.515,55.296) 59.817,58.598 60.071,58.598 62.738,61.265 ; v2(67.564,26.975) 67.564,27.105 67.12,27.55 67.12,36.817 P3.1@66.802,37.135 P3.2@66.802,39.675 P3.3@66.802,42.215 P3.4@66.802,44.755 P3.5@66.802,47.295 P3.6@66.802,49.835 P3.7@66.802,52.375 P3.8@66.802,54.915 62.738,58.979 62.738,61.265 ; v2(68.453,71.708) 64.106,71.708 62.738,73.076 ; v2(68.707,80.253) 64.581,80.253 v2(60.071,75.743) 62.738,73.076 ; v2(68.834,60.757) 66.768,60.757 65.117,62.408 62.865,62.408 62.738,62.535 ; 62.738,61.265 62.738,62.535 ; 62.738,62.535 62.738,73.076
  Bottom Layer w0.762: 5.08,49.835 5.08,35.19 5.485,34.785 5.665,34.785 9.759,30.69 18.034,30.69 ; 5.397,50.152 5.397,50.552 5.143,50.806 5.143,51.911 5.397,52.165 5.397,53.092 5.143,53.346 5.143,54.451 5.397,54.705 5.397,66.662 8.89,70.155 v2(10.541,70.155) ; v2@15.024,82.601 15.278,82.347 19.431,82.347 22.664,79.114 v2(23.368,79.114) ; 18.066,30.69 22.218,30.69 25.4,27.508
VCC_IN: F1.2 P1.1 | length 6.8
  Top Layer w0.762: F1.2@31.238,74.426 34.838,74.426 P1.1@37.073,76.661
VDDA: C13.2 C14.2 R38.2 U1.32 U1.33 | length 8.6
  Top Layer w0.254: C13.2@22.352,38.278 C14.2@23.368,38.278 R38.2@24.384,38.278 24.46,38.354 28.25,38.354 28.417,38.521 28.459,38.521 ; U1.33@29.534,38.521 28.459,38.521 ; U1.32@29.534,39.021 28.959,39.021 28.459,38.521
pads on no net: Buzzer1.3 Buzzer1.4 P1.0 P5.0 P9.0 P10.0 P11.0 P12.0 P13.0 P14.0 P15.0 P18.0 TJA1.5 U1.5 U1.6 U1.7 U1.8 U1.9 U1.12 U1.26 U1.27 U1.28 U1.29 U1.37 U1.44 U1.45 U1.49 U1.50 U1.53 U1.54 U1.55 U1.56 U1.57 U1.68 U1.79 U1.80 U1.87 U1.88 U1.93 U1.100 U1.110 U1.114 U1.115 U1.117 U1.118 U1.123 U1.124 U1.125 U1.126 U1.127 U1.134 U1.140 U1.141 U1.142 U2.4

## Polygon pours and split planes (outlines as drawn)
no net on Top Layer "Top Layer-No Net" (solid, remove dead copper, pour order 16): 71.488,91.669
no net on Top Layer "Top Layer-No Net 1" (solid, remove dead copper, pour order 14): 70.485,93.269

## Other copper
Top Layer:
  text "注释：这个S8050 NPN管用的是非正常封装，别的地方不要再用了，容易出错。" at -3.607,111.785 h1.52

## Silkscreen, mask and mechanical layers (free items; w line width, h text height)
Top Overlay:
  drawing of 4116 lines, arcs and shapes, not listed
  text "92_PG7" at 64.389,87.935 h0.76
  text "1_PE2" at 5.537,87.579 h0.76
  text "-" at 44.831,86.157 h1.52
  text "+" at 33.401,86.106 h1.52
  text "I2C1" at 9.652,83.541 h0.76
  text "+ SCL SDA -" at 11.76,82.702 h0.51 r270
  text "USART2" at 67.589,81.305 h0.76 r90
  text "+ R T -" at 68.986,81.077 h0.76 r90
  text "+ - SWD SCK" at 47.981,79.451 h0.76
  text "H L" at 58.699,79.451 h0.76
  text "0  0" at 46.761,78.029 h0.76
  text "BOOT" at 52.172,72.288 h1.52
  text "UART5" at 67.437,71.526 h0.76 r90
  text "POWER" at 36.269,70.841 h1.52
  text "+ R T -" at 68.809,70.815 h0.76 r90
  text "Buzzer" at 26.695,70.587 h0.76
  text "139_TIM10_CH1" at 26.619,69.367 h0.76
  text "RST" at 13.386,68.783 h1.52
  text "I2C2" at 9.093,67.818 h0.76
  text "1  1" at 47.041,67.285 h0.76
  text "OLED" at 37.059,66.878 h1.52
  text "+ SCL SDA -" at 11.506,66.853 h0.51 r270
  text "SPI3     132 129 128" at 34.315,65.329 h0.76
  text "PG_15 _14 _13" at 39.548,64.186 h0.76
  text "UART4" at 67.539,62.103 h0.76 r90
  text "+ R T -" at 68.809,61.366 h0.76 r90
  text "2_PE3" at 5.004,59.08 h0.76
  text "P - +" at 60.655,56.718 h1.52
  text "GND" at 5.461,55.575 h0.76
  text "ADC3" at 7.874,55.55 h0.76
  text "TIM3" at 56.617,55.067 h0.76
  text "99_CH4" at 55.855,53.95 h0.76
  text "9" at 10.617,53.518 h0.51
  text "98_CH3" at 55.804,51.968 h0.76
  text "14" at 10.566,51.029 h0.51
  text "97_CH2" at 55.778,49.505 h0.76
  text "15" at 10.566,48.566 h0.51
  text "USART1" at 69.444,46.99 h0.76 r90
  text "96_CH1" at 55.804,46.863 h0.76
  text "+ R T -" at 70.841,46.253 h0.76 r90
  text "4" at 10.592,45.923 h0.51
  text "TIM4" at 56.642,45.466 h0.76
  text "91_PG6" at 70.815,45.212 h0.76
  text "86_CH4" at 55.761,44.374 h0.76
  text "5" at 10.617,43.439 h0.51
  text "85_CH3" at 55.787,41.758 h0.76
  text "6" at 10.592,40.843 h0.51
  text "82_CH2" at 55.787,39.268 h0.76
  text "7" at 10.617,38.354 h0.51
  text "81_CH1" at 55.905,36.779 h0.76
  text "8" at 10.566,35.966 h0.51
  text "34_T5C1_B" at 14.656,33.884 h0.76
  text "35_T5C2_G" at 14.63,32.741 h0.76
  text "36_T5C3_R" at 14.63,31.674 h0.76
  text "47 58 60 64 66" at 33.604,30.226 h0.89
  text "46 59 63 65 67" at 33.587,28.702 h0.89
  text "NRF24L01" at 52.578,28.677 h0.76
  text "- NSS SCK MISO MOSI +" at 14.453,27.381 h0.64
  text "USART3" at 67.513,26.949 h0.76 r90
  text "+ R T -" at 68.91,26.213 h0.76 r90
  text "3_PE4" at 5.69,24.409 h0.76 r90
  text "90_PG5" at 70.815,24.333 h0.76
  text "4_PE5" at 30.158,23.317 h0.76 r90
  text "89_PG4" at 48.861,23.139 h0.76 r90
  text "Designed" at 71.298,8.661 h0.76
  text "by OuyJy" at 70.79,7.087 h0.76
Mechanical 1:
  lines w0.254: -3.277,97.18 cw(c-54.077,50.294) 4.678,86.72 4.648,13.208 ; -3.198,97.095 cw(c0,100) 3.783,102.085 ; -3.177,2.927 ccw(c0,0) 4.143,-1.223 ; -3.154,2.937 ccw(c-54.077,49.936) 4.601,13.072 ; 3.734,102.108 ccw(c39.911,124.722) 18.741,87.681 ; 4.115,-1.194 cw(c39.883,-27.422) 14.694,9.086 ; 14.808,9.119 24.651,9.119 64.955,9.119 ; 18.618,87.655 34.773,87.655 ; 34.595,87.655 61.216,87.655 ; 61.216,87.621 ccw(c40.256,124.726) 75.819,101.244 ; 64.955,9.205 cw(c39.726,-27.635) 75.977,-1.568 ; 75.628,14.651 ccw(c143.122,49.915) 83.261,2.845 ; 75.667,14.757 75.625,85.185 cw(c142.998,49.823) 83.387,97.111 ; 75.84,101.24 cw(c79.81,99.537) 83.414,97.155 ; 76.017,-1.647 ccw(c80.01,0) 83.273,2.831

## Text inside footprints (layer, text, board x,y; h text height)
P17: Top Overlay "8" at 60.909,26.264 h1.27; Top Overlay "7" at 61.011,23.571 h1.27; Top Overlay "1" at 49.403,23.343 h1.27; Top Overlay "2" at 49.225,26.34 h1.27
P19: Top Overlay "2" at 33.858,26.264 h1.27; Top Overlay "1" at 34.011,23.724 h1.27; Top Overlay "9" at 44.729,23.927 h1.27; Top Overlay "10" at 43.354,26.467 h1.27
RGB1: Top Overlay "R" at 24.44,32.6 h0.5; Top Overlay "G" at 24.44,34.124 h0.5; Top Overlay "B" at 23.678,34.124 h0.5